# Altium PCB PCB2 - 副本.PCBDOC (part 3 of 3)
Units mil, origin at the board's own origin, x right, y up, seen from the top; angles counter-clockwise.
Board outline 6000 x 4000 mil, 2 copper layers (Top Layer, Bottom Layer); 72 components, 143 nets, 481 pads, 207 vias.
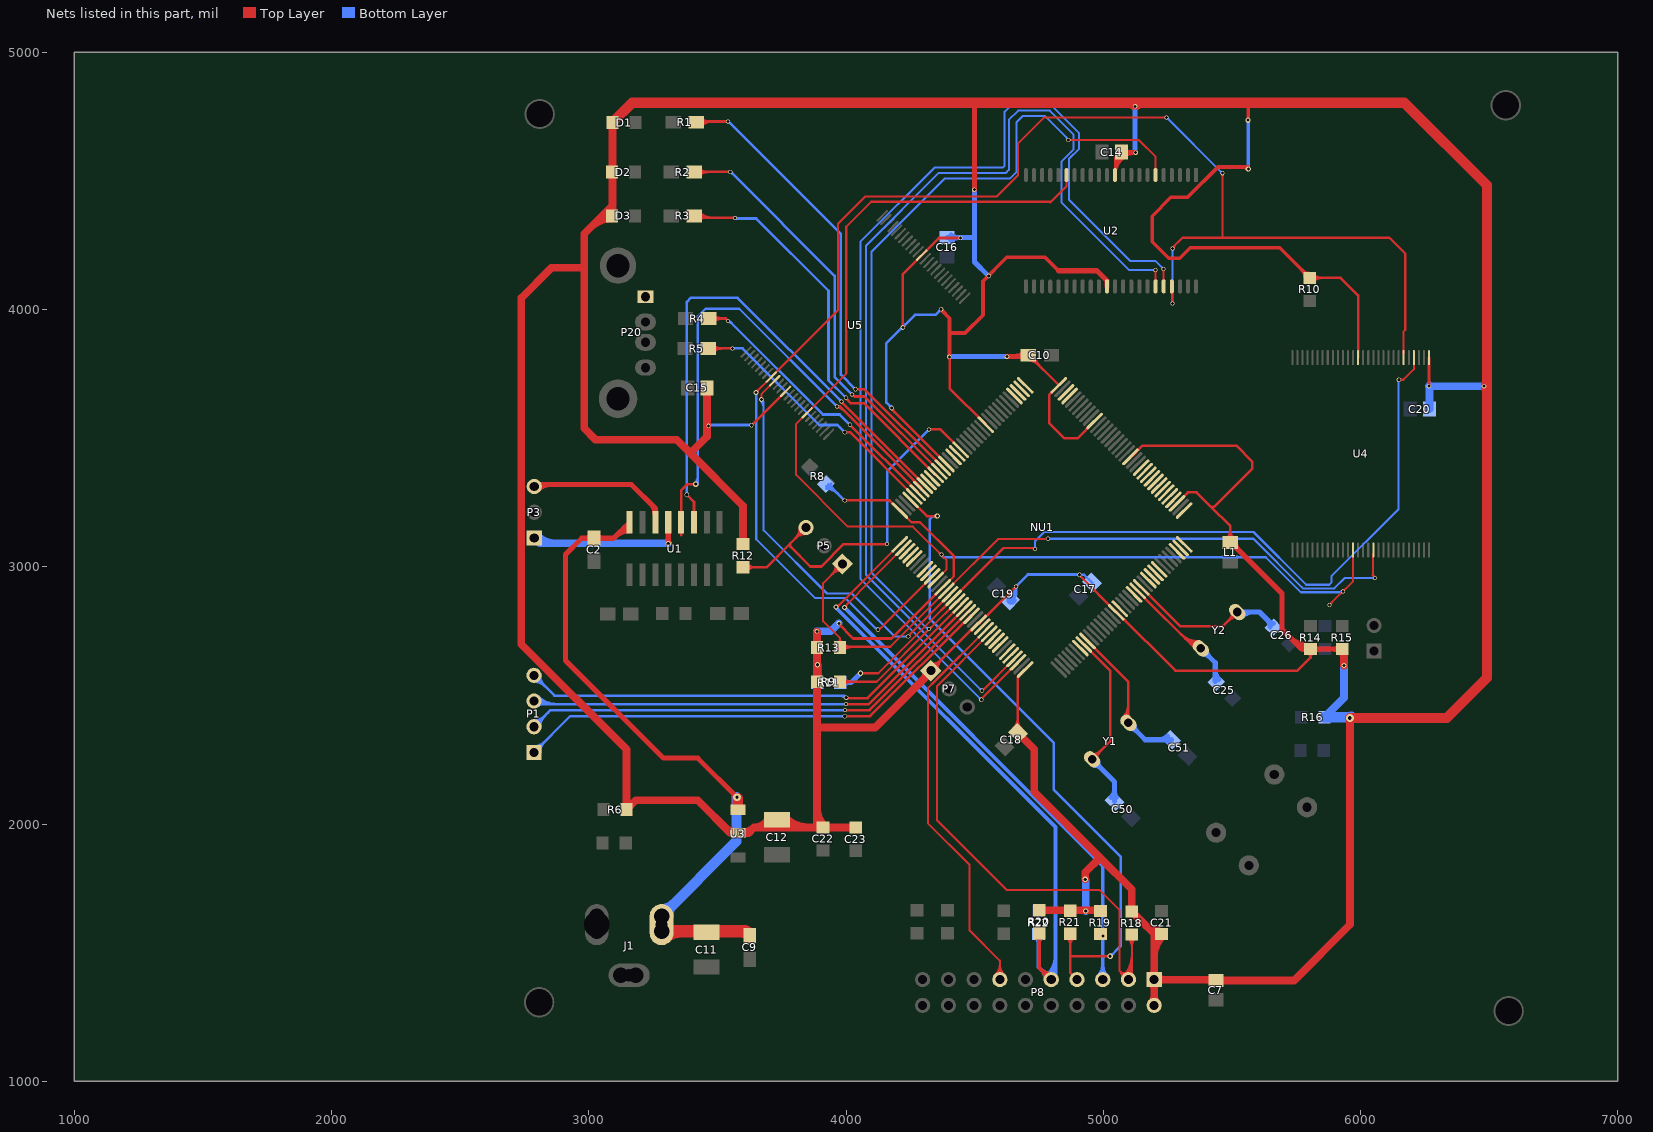
[diagram p3: the nets of this part, all layers, seen from the top]

## Via types
v1: diameter 16, hole 12, Top Layer to Bottom Layer, 141 vias
v2: diameter 18, hole 12, Top Layer to Bottom Layer, 34 vias
v3: diameter 20, hole 12, Top Layer to Bottom Layer, 29 vias
v4: diameter 30, hole 12, Top Layer to Bottom Layer, 2 vias
v5: diameter 30, hole 14, Top Layer to Bottom Layer, 1 vias

## Nets (pads, with @x,y where several pads share a name; then routed paths per layer and width w, separated by ;. In a path a pad name is that pad's centre, name@x,y a point inside that pad or via, vN(x,y) a via of type N, cw(c..) or ccw(c..) an arc to the next point about the centre after c; other vN are vias at no path point) (continued)
OSCIN: C25.2 NU1.23 Y2.2 | length 754.7
  Top Layer w10: NU1.23@5133.65,2906.63 5357.7,2682.58 Y2.2@5379.58,2682.58 ; 5302.02,2738.26 ccw(c5371.27,2807.51) Y2.2@5371.27,2709.57 ; 5319.09,2721.18 ccw(c5371.27,2773.37) Y2.2@5371.27,2699.57 ; 5336.16,2704.11 ccw(c5371.27,2739.22) Y2.2@5371.27,2689.57
  Bottom Layer w20: Y2.2@5379.58,2682.58 5435.36,2626.8 C25.2@5435.36,2554.64 ; Y2.2@5387.89,2660.59 cw(c5387.89,2627.55) 5411.25,2650.91 cw(c5434.61,2674.27) Y2.2@5401.57,2674.27 ; 5435.36,2597.51 ccw(c5485.23,2597.51) C25.2@5449.97,2562.25
OSCOUT: C26.2 NU1.24 Y2.1 | length 782.5
  Top Layer w10: NU1.24@5147.57,2920.55 5299.11,2769 5466,2769 Y2.1@5521,2824 ; Y2.1@5502.31,2824 cw(c5457.21,2824) 5489.1,2792.1 cw(c5521,2760.21) Y2.1@5521,2805.31
  Bottom Layer w20: Y2.1@5521,2824 5608,2824 C26.2@5654.36,2777.64 ; Y2.1@5538.98,2806.02 cw(c5582.4,2762.6) 5582.4,2824 ; 5636,2796 cw(c5605.57,2765.57) C26.2@5648.61,2765.57 ; 5646,2786 ccw(c5662.29,2802.3) C26.2@5662.29,2779.25
PA0: NU1.34
PA1: NU1.35
PA2: NU1.36
PA3: NU1.37
PA4: NU1.40
PA5: NU1.41
PA6: NU1.42
PA7: NU1.43
PA8: NU1.100
PA9: NU1.101 U1.11 | length 2167.6
  Top Layer w10: v2@3381,3276 cw(c3381,3266.34) 3387.83,3273.17 cw(c3394.66,3280) v2@3385,3280 ; v2(3381,3280) 3409,3252 U1.11@3409,3173.36 ; U1.11@3404.18,3209.67 ccw(c3392.56,3221.3) 3409,3221.3 ccw(c3425.44,3221.3) U1.11@3413.82,3209.67 ; v1@3984,3642 3984,3638.69 NU1.101@4306.83,3315.86 ; v1@3985,3642 ccw(c3995.4,3642) 3988.05,3634.65
  Bottom Layer w10: v2@3378.17,3282.83 ccw(c3371.34,3289.66) 3381,3289.66 ccw(c3390.66,3289.66) v2@3383.83,3282.83 ; v2@3381,3279 v2(3381,3280) 3381,4030 3396,4045 3579,4045 v1(3982,3642)
PA10: NU1.102 U1.12 | length 2244.5
  Top Layer w10: U1.12@3354.18,3137.05 cw(c3342.56,3125.42) 3359,3125.42 cw(c3375.44,3125.42) U1.12@3363.82,3137.05 ; U1.12@3354.18,3209.67 ccw(c3342.56,3221.3) 3359,3221.3 ccw(c3375.44,3221.3) U1.12@3363.82,3209.67 ; 3359,3123 U1.12@3359,3173.36 3359,3297 3383,3321 v3(3416,3321) ; v3@3412.46,3317.46 ccw(c3403.93,3308.93) 3403.93,3321 ccw(c3403.93,3333.07) v3@3412.46,3324.54 ; v1@3965,3620 cw(c3965,3586.72) 3988.53,3610.25 ; v1(3965,3623) 3975.78,3623 4292.92,3305.87 NU1.102@4292.92,3301.94 ; v1@3966.26,3620.28 cw(c3971.8,3608.23) 3981.18,3617.61 ; 4262.14,3336.64 cw(c4253.89,3328.38) NU1.102@4265.56,3328.38
  Bottom Layer w10: v3@3412.46,3324.54 ccw(c3384.62,3352.38) 3424,3352.38 ; v3@3415,3324 3424,3333 ; v3@3419.54,3317.46 ccw(c3408.76,3328.24) 3424,3328.24 ; v3@3420.87,3322.12 cw(c3432.26,3324.74) 3424,3333 ; v1(3965,3623) 3585,4003 3454,4003 3424,3973 3424,3333
PA11: NU1.103 R4.2 | length 1181.8
  Top Layer w10: R4.2@3466,3965 3532,3965 v1(3542,3955) ; R4.2@3485.14,3950.86 cw(c3519.28,3916.72) 3519.28,3965 cw(c3519.28,4013.28) R4.2@3485.14,3979.14 ; v1@4016.01,3551 NU1.103@4279,3288.02
  Bottom Layer w10: 3555.66,3946.34 ccw(c3542,3932.69) 3542,3952 3550,3952 3910,3592 3975,3592 v1(4015,3552)
PA12: NU1.104 R5.2 | length 1136.1
  Top Layer w10: R5.2@3464,3848 3465,3849 v1(3559,3849) ; R5.2@3476.07,3840.93 cw(c3495.56,3821.44) 3495.56,3849 ; R5.2@3483.14,3833.86 cw(c3519.7,3797.3) 3519.7,3849 ; R5.2@3483.14,3862.14 ccw(c3514.87,3893.87) 3514.87,3849 ; v1(3995,3523) 4016.18,3523 NU1.104@4265.08,3274.1
  Bottom Layer w10: v1@3560,3849 3598,3849 3896,3551 3967,3551 v1(3995,3523)
PA13: NU1.105 P8.7 R21.1 | length 2675.8
  Top Layer w10: NU1.105@4251.16,3260.18 4314.34,3197 v3(4355,3197) ; v3@4351.46,3193.46 ccw(c4342.93,3184.93) 4342.93,3197 ccw(c4342.93,3209.07) v3@4351.46,3200.54 ; R21.1@4858.79,1559.79 cw(c4826.89,1527.89) 4872,1527.89 cw(c4917.11,1527.89) R21.1@4885.21,1559.79 ; R21.1@4872,1573 4872,1484 ; P8.7@4898,1395 4872,1421 4872,1484 ; v3@5023.46,1482.46 ccw(c5014.93,1473.93) 5014.93,1486 ccw(c5014.93,1498.07) v3@5023.46,1489.54 ; v3(5027,1486) 4874,1486 4872,1484
  Bottom Layer w10: v3@4351.46,3193.46 ccw(c4342.93,3184.93) 4342.93,3197 ccw(c4342.93,3209.07) v3@4351.46,3200.54 ; v3(4355,3197) 4338,3197 4325,3184 4325,2798 4807,2316 4807,2134 5068,1873 5068,1525 v3@5027,1484 ; v3@5027,1491 ccw(c5027,1507.9) 5038.95,1495.95
PA14: NU1.109 P8.9 R20.1 R22.1 | length 2980
  Top Layer w8: v3@3961,2849 ccw(c3961,2872.71) 3977.76,2855.94 ; v3@3962.91,2841.09 NU1.109@4209.4,3087.58
  Top Layer w15: R20.1@4739.56,1563.56 cw(c4711.93,1535.93) 4751,1535.93 cw(c4790.07,1535.93) R20.1@4762.44,1563.56 ; R20.1@4751,1575 4751,1442 P8.9@4798,1395 ; P8.9@4775.97,1395 ccw(c4722.79,1395) 4760.4,1432.6 ccw(c4798,1470.21) P8.9@4798,1417.03
  Bottom Layer w15: v3(3961,2843) 3961,2840.77 4814,1987.77 P8.9@4814,1411 ; R22.1@4737.56,1560.56 cw(c4709.93,1532.93) 4749,1532.93 cw(c4788.07,1532.93) R22.1@4760.44,1560.56 ; R22.1@4749,1572 4749,1444 P8.9@4798,1395 ; P8.9@4775.97,1395 ccw(c4722.79,1395) 4760.4,1432.6 ccw(c4798,1470.21) P8.9@4798,1417.03 ; P8.9@4782.42,1410.58 ccw(c4706.19,1486.81) 4814,1486.81 ; P8.9@4793.03,1399.97 ccw(c4742.41,1450.59) 4814,1450.59
PA15: NU1.110 P8.5 R19.1 | length 2295.4
  Top Layer w8: v3@3991,2841.34 4108.33,2958.67 ; v3@4000,2841 cw(c4022.55,2841) 4006.61,2856.95 ; 4105.66,2956 4108.33,2958.67 ; NU1.110@4223.32,3073.66 4108.33,2958.67
  Bottom Layer w15: v3(3994,2841) 4998,1837 P8.5@4998,1395 ; P8.5@4982.42,1410.58 ccw(c4944.82,1448.18) 4998,1448.18 ccw(c5051.18,1448.18) P8.5@5013.58,1410.58
  other v3: 4999,1564
PB0: NU1.46
PB1: NU1.47
PB2: NU1.48
PB3: NU1.133 P8.13 | length 1731.2
  Top Layer w8: 4346,2556 4318,2528 4318,2003 4480,1841 4480,1587 4598,1469 P8.13@4598,1395 ; 4346,2556.05 NU1.133@4543.47,2753.51 ; P8.13@4579.95,1413.05 ccw(c4536.37,1456.63) 4598,1456.63 ccw(c4659.63,1456.63) P8.13@4616.05,1413.05 ; P8.13@4585.61,1407.39 ccw(c4555.68,1437.32) 4598,1437.32 ccw(c4640.32,1437.32) P8.13@4610.39,1407.39
PB4: NU1.134 P8.3 R18.1 | length 2616.2
  Top Layer w8: NU1.134@4557.38,2739.59 4354.4,2536.6 4354.4,2013.6 4624,1744 4985,1744 5063,1666 5063,1430 ; P8.3@5072.83,1399.24 ccw(c5038.1,1405.09) 5063,1430 ; P8.3@5079.95,1413.05 ccw(c5004.99,1488.01) 5111,1488.01 ; P8.3@5080.72,1397.91 ccw(c5056.87,1401.93) 5073.97,1419.03 ccw(c5091.07,1436.13) P8.3@5095.09,1412.28 ; P8.3@5085.61,1407.39 ccw(c5024.3,1468.7) 5111,1468.7 ; P8.3@5091.26,1401.74 ccw(c5043.61,1449.39) 5111,1449.39 ; P8.3@5093.76,1420.17 cw(c5087.91,1454.9) 5063,1430 ; P8.3@5096.92,1396.08 ccw(c5062.93,1430.07) 5111,1430.07 ; R18.1@5097.08,1556.08 cw(c5063.48,1522.48) 5111,1522.48 cw(c5158.52,1522.48) R18.1@5124.92,1556.08 ; R18.1@5102.74,1561.74 cw(c5082.79,1541.79) 5111,1541.79 cw(c5139.21,1541.79) R18.1@5119.26,1561.74 ; 5111,1425.24 ccw(c5128.24,1425.24) P8.3@5116.05,1413.05 ; R18.1@5111,1570 5111,1408 P8.3@5098,1395 5063,1430
PB5: NU1.135
PB6: NU1.136
PB7: NU1.137
PB8: NU1.139
PB9: NU1.140
PB10: NU1.69
PB11: NU1.70
PB12: NU1.73
PB13: NU1.74
PB14: NU1.75
PB15: NU1.76
PC0: NU1.26
PC1: NU1.27
PC2: NU1.28
PC3: NU1.29
PC4: NU1.44
PC5: NU1.45
PC6: NU1.96 R1.1 | length 1943.5
  Top Layer w10: R1.1@3421,4731 v1(3541,4731) ; R1.1@3430.07,4720.93 cw(c3454.38,4696.62) 3454.38,4731 ; R1.1@3437.14,4713.86 cw(c3478.53,4672.47) 3478.53,4731 ; R1.1@3437.14,4742.14 ccw(c3464.04,4769.04) 3464.04,4731 ; v1(4037,3690) 4071.89,3690 NU1.96@4376.43,3385.45
  Bottom Layer w10: v1@3541,4728 cw(c3541,4715.93) 3549.54,4724.46 ; v1@3543,4731 3980,4294 3980,3747 v1(4037,3690)
PC7: NU1.97 R2.1 | length 1782
  Top Layer w10: R2.1@3411,4535 v1(3550,4535) ; R2.1@3422.07,4526.93 cw(c3441.56,4507.44) 3441.56,4535 ; R2.1@3429.14,4519.86 cw(c3465.7,4483.3) 3465.7,4535 ; R2.1@3429.14,4548.14 ccw(c3460.87,4579.87) 3460.87,4535 ; v1@4023,3667 cw(c4023,3652.51) 4033.24,3662.76 ; v1(4023,3670) 4026,3670 4034,3662 4072.05,3662 NU1.97@4362.51,3371.53
  Bottom Layer w10: v1@3550,4532 cw(c3550,4519.93) 3558.54,4528.46 ; v1@3551,4536 3956,4131 3956,3737 v1(4023,3670)
PC8: NU1.98 R3.1 | length 1687.1
  Top Layer w10: R3.1@3418,4356 v1(3569,4356) ; R3.1@3422.07,4371.07 ccw(c3458.46,4407.46) 3458.46,4356 ; R3.1@3429.14,4349.86 cw(c3443.97,4335.03) 3443.97,4356 ; R3.1@3429.14,4378.14 ccw(c3482.6,4431.6) 3482.6,4356 ; v1(4000,3657) 4000,3655 4020,3635 4071.21,3635 NU1.98@4348.59,3357.62 ; v1@4003,3657 ccw(c4015.07,3657) 4006.54,3648.46
  Bottom Layer w10: v1@3567,4354 3651,4354 3932,4073 3932,3725 v1(4000,3657) ; v1@3571.12,4358.12 ccw(c3581.07,4368.07) 3581.07,4354
PC9: NU1.99
PC10: NU1.111
PC11: NU1.112
PC12: NU1.113
PC13: NU1.7
PC14: C50.2 NU1.8 Y1.2 | length 897.5
  Top Layer w10: NU1.8@4924.86,2697.83 5028,2594.69 5028,2323 Y1.2@4956.58,2251.58 ; Y1.2@4956.58,2270.26 ccw(c4956.58,2315.37) 4988.48,2283.48 ccw(c5020.37,2251.58) Y1.2@4975.26,2251.58
  Bottom Layer w20: Y1.2@4956.58,2251.58 5044.36,2163.8 C50.2@5044.36,2088.64 ; Y1.2@4964.89,2229.59 cw(c4964.89,2196.55) 4988.25,2219.91 cw(c5011.61,2243.27) Y1.2@4978.57,2243.27 ; C50.2@5030.22,2102.78 ccw(c4996.08,2136.92) 5044.36,2136.92 ; C50.2@5044.36,2119.85 ccw(c5068.5,2119.85) C50.2@5051.43,2102.78
PC15: C51.2 NU1.9 Y1.1 | length 796.5
  Top Layer w10: NU1.9@4938.78,2711.75 5098,2552.53 Y1.1@5098,2393 ; Y1.1@5076.48,2414.52 ccw(c5024.53,2466.47) 5098,2466.47 ; Y1.1@5083.55,2407.45 ccw(c5048.67,2442.33) 5098,2442.33 ; 5098,2426.36 ccw(c5114.75,2426.36) Y1.1@5102.9,2414.52
  Bottom Layer w20: Y1.1@5098,2393 5163.36,2327.64 C51.2@5264.36,2327.64 ; Y1.1@5106.31,2371.01 cw(c5106.31,2337.97) 5129.67,2361.33 cw(c5153.03,2384.69) Y1.1@5119.99,2384.69 ; 5216.08,2327.64 ccw(c5216.08,2375.92) C51.2@5250.22,2341.78 ; C51.2@5233.15,2327.64 cw(c5233.15,2303.5) C51.2@5250.22,2320.57
PD2: NU1.116
PD3: NU1.117
PD4: NU1.118 U2.41 U4.34 U5.8 | length 6187
  Top Layer w8: v3(3650,3678) 3709.44,3737.44 U5.8@3709.44,3737.56 3969,3997.13 3969,4333 4076,4440 4587,4440 4668,4521 4668,4644 4771,4747 v1@5244,4747 ; v3@3650,3684 ccw(c3650,3698.49) 3660.24,3688.24 ccw(c3670.49,3678) v3@3656,3678 ; v1@4125,2756 4129,2756 4150,2777 4150,2777.63 NU1.118@4334.67,2962.3 ; v1@4125,2759 ccw(c4125,2775.9) 4136.95,2763.95 ; v1@5243.17,4744.17 ccw(c5236.34,4737.34) 5236.34,4747 ccw(c5236.34,4756.66) v1@5243.17,4749.83 ; U2.41@5263.77,4067.5 cw(c5257.16,4060.89) 5266.51,4060.89 cw(c5275.86,4060.89) U2.41@5269.25,4067.5 ; 5266.51,4039.66 ccw(c5284.66,4039.66) v1@5271.83,4026.83 ; U2.41@5266.51,4089.93 5266.51,4030.49 v1@5274,4023 ; v1@5266.51,4237.51 5308,4279 6113,4279 6173,4219 ; v1@5274,4237 cw(c5293.31,4237) 5279.66,4250.66 ; v1@5460.17,4527.17 cw(c5453.34,4520.34) 5463,4520.34 cw(c5472.66,4520.34) v1@5465.83,4527.17 ; 5463,4283 v1(5463,4530) ; U4.34@6167,3828 6167,3914 6174,3921 6174,4216 6173,4217
  Bottom Layer w8: v3@3645.76,3673.76 cw(c3633.1,3661.1) 3651,3661.1 ; 3651,3665.93 cw(c3662.07,3665.93) v3@3654.24,3673.76 ; v3@3651,3683 3651,3107 3879,2879 3996,2879 4121,2754 v1@4125,2754 ; 4109.64,2765.36 ccw(c4125,2780.73) v1@4125,2759 ; v1@5246,4743 cw(c5246,4733.34) 5252.83,4740.17 cw(c5259.66,4747) v1@5250,4747 ; v1(5246,4747) v1(5463,4530) v1@5465,4528 ; v1@5266.17,4026.83 ccw(c5256.93,4036.07) 5270,4036.07 ; v1@5267.17,4234.17 cw(c5260.34,4227.34) 5270,4227.34 cw(c5279.66,4227.34) v1@5272.83,4234.17 ; v1@5270,4021 v1(5270,4237) ; v1@5459,4530 ccw(c5449.34,4530) 5456.17,4536.83 ccw(c5463,4543.66) v1@5463,4534
  other v1: 4125,2755 5269,4024
PD5: NU1.119 U2.17 U4.13 U5.18 | length 4798.4
  Top Layer w8: NU1.119@4348.59,2948.38 4391,2990.79 4391,3025 4260,3156 4007,3156 3806,3357 3806,3555.74 4001,3750.74 4001,4322 4098,4419 4797,4419 ; 4360.76,3055.24 ccw(c4371,3065.49) v1@4371,3051 ; v1@4375,3047 ccw(c4389.49,3047) 4379.24,3036.76 ; 4794,4416 4857.06,4479.06 U2.17@4857.06,4523 ; U2.17@4854.32,4500.58 cw(c4847.71,4493.96) 4857.06,4493.96 cw(c4866.42,4493.96) U2.17@4859.8,4500.58 ; v1@5879,2855 ccw(c5879,2864.17) 5885.49,2857.69 ; v1@5880,2852.2 5891,2863.2 5891,2864 5971.22,2944.22 U4.13@5971.22,3065 ; v1@5883,2851 cw(c5893.14,2851) 5885.97,2858.17 ; 5923.46,2896.46 cw(c5932,2887.93) v1@5932,2900 ; v1@5936,2904 cw(c5948.07,2904) 5939.54,2912.54
  Bottom Layer w8: v1@4371,3044 4378,3037 5632,3037 5768,2901 5930,2901 v1@5932,2903 ; v1@4374.79,3045.73 ccw(c4381.5,3043.5) 4376.5,3038.5 ; 5915.1,2901 ccw(c5915.1,2920.9) v1@5929.17,2906.83
  other v1: 5879,2851 5932,2904 4371,3047
PD6: NU1.122 P5.1 R13.2 U4.17 | length 3209.1
  Top Layer w8: P5.1@3960.47,3011 cw(c3898.84,3011) 3942.42,2967.42 cw(c3986,2923.84) P5.1@3986,2985.47 ; R13.2@3966.91,2704.22 ccw(c3956.29,2722) 3977,2722 ; P5.1@3968.47,3011 cw(c3926.16,3011) 3956.08,2981.08 cw(c3986,2951.16) P5.1@3986,2993.47 ; R13.2@3977,2686 3977,2722 ; R13.2@3980,2689 4153,2689 ; R13.2@3985.26,2679.05 cw(c4009.28,2655.04) 4009.28,2689 ; R13.2@3985.26,2695.58 ccw(c4001.14,2711.46) 4001.14,2689 ; P5.1@3986,3011 3911,2936 3911,2788 3977,2722 ; R13.2@3987.09,2704.22 cw(c3997.71,2722) 3977,2722 ; R13.2@3990.92,2673.4 cw(c4028.59,2635.72) 4028.59,2689 ; R13.2@3990.92,2701.23 ccw(c4020.46,2730.77) 4020.46,2689 ; 4149,2689 4153,2689 ; 4772.93,3108 ccw(c4772.93,3121.07) v1@4782.17,3111.83 ; v1@4787,3112 4783,3108 4591.73,3108 NU1.122@4390.35,2906.63 4172.73,2689 4153,2689 ; 6047,2969 cw(c6034.89,2956.88) v1@6052,2956.17 ; U4.17@6049,3050 6049,2967 v1@6059,2957
  Bottom Layer w8: v1(4785,3109) 5584,3109 5772,2921 ; v1@4787.83,3106.17 cw(c4794.66,3099.34) 4794.66,3109 cw(c4794.66,3118.66) v1@4787.83,3111.83 ; 5772,2920 5777,2915 5889,2915 ; 5890,2916 5898,2916 5938,2956 v1@6052,2956 ; v1@6053.17,2953.17 ccw(c6046.34,2946.34) 6046.34,2956 ccw(c6046.34,2965.66) v1@6053.17,2958.83
  other v1: 6056,2956
PD7: NU1.123 U5.9 | length 1664.7
  Top Layer w8: v2@3667.46,3653.54 ccw(c3658.93,3662.07) 3671,3662.07 ccw(c3683.07,3662.07) v2@3674.54,3653.54 ; v2(3671,3650) 3671,3671.29 U5.9@3723.36,3723.64 ; v1@4243,2729 4243,2731.44 NU1.123@4404.27,2892.71 NU1.123@4404.71,2892.71 ; v1@4246,2729 cw(c4259.12,2729) 4249.84,2738.28
  Bottom Layer w8: v2@3667.46,3646.46 cw(c3637.2,3616.2) 3680,3616.2 ; v2@3673,3648 3680,3641 3680,3142 3926,2896 4023,2896 4190,2729 v1(4242,2729) ; v2@3673.12,3652.12 cw(c3656.51,3635.51) 3680,3635.51 ; v1@4239.17,2726.17 ccw(c4232.34,2719.34) 4232.34,2729 ccw(c4232.34,2738.66) v1@4239.17,2731.83
PE0: NU1.141 U2.39 | length 4161.8
  Top Layer w8: v1@4528,2522 ccw(c4528,2538.09) 4539.37,2526.71 ; v1@4530.66,2518 NU1.141@4654.82,2642.16 ; v1@5200.17,4150.17 cw(c5192.09,4142.09) 5203.52,4142.09 ; U2.39@5200.78,4112.35 ccw(c5194.17,4118.97) 5203.52,4118.97 ccw(c5212.87,4118.97) U2.39@5206.26,4112.35 ; U2.39@5203.52,4089.93 v1@5203.52,4151.48 ; 5203.52,4144.6 cw(c5211.4,4144.6) v1@5205.83,4150.17
  Bottom Layer w8: v1@4524,2518 ccw(c4514.34,2518) 4521.17,2524.83 ccw(c4528,2531.66) v1@4528,2522 ; v1(4528,2518) 4078,2968 4078,4249 4359,4530 4620,4530 4633,4543 4633,4737 4669,4773 4792,4773 4885,4680 4885,4623.2 4837,4575.2 4837,4417 5101,4153 v1(5203,4153) ; v1@5200.17,4150.17 ccw(c5193.34,4143.34) 5193.34,4153 ccw(c5193.34,4162.66) v1@5200.17,4155.83
PE1: NU1.142 U2.40 | length 4306.6
  Top Layer w8: v1@4523,2482.5 NU1.142@4668.74,2628.24 ; v1@4530,2483 cw(c4545.69,2483) 4534.59,2494.09 ; v1@5231.17,4155.17 cw(c5221.89,4145.89) 5235.02,4145.89 ; U2.40@5232.28,4112.35 ccw(c5225.66,4118.97) 5235.02,4118.97 ccw(c5244.37,4118.97) U2.40@5237.75,4112.35 ; U2.40@5235.02,4089.93 v1@5235.02,4155.98
  Bottom Layer w8: v1@4522,2483 ccw(c4512.34,2483) 4519.17,2489.83 ccw(c4526,2496.66) v1@4526,2487 ; v1(4526,2483) 4056,2953 4056,4263 4346,4553 4611,4553 4617,4559 4617,4769 4644,4796 4796,4796 4905,4687 4905,4623.4 4867,4585.4 4867,4427 5106,4188 5204,4188 v1(5234,4158) ; v1@5230,4158 ccw(c5220.34,4158) 5227.17,4164.83 ccw(c5234,4171.66) v1@5234,4162
PF6: NU1.18
PF10: NU1.22
PF11: NU1.49
PG6: NU1.91 P5.3 R12.1 | length 1675.6
  Top Layer w10: R12.1@3600,2998 3690.16,2998 3783.58,3091.42 ; R12.1@3614.53,2984.79 cw(c3646.42,2952.89) 3646.42,2998 cw(c3646.42,3043.11) R12.1@3614.53,3011.21 ; P5.3@3820.05,3152.42 cw(c3760.84,3152.42) 3802.71,3110.55 cw(c3844.58,3068.68) P5.3@3844.58,3127.89 ; P5.3@3830.05,3152.42 cw(c3794.98,3152.42) 3819.78,3127.62 cw(c3844.58,3102.82) P5.3@3844.58,3137.89 ; P5.3@3844.58,3152.42 3783.58,3091.42 ; v1(4159,3088) 3991,3088 3904,3001 3861,3001 3783.58,3078.42 3783.58,3091.42 ; v1@4323,3534 4367.08,3534 NU1.91@4446.03,3455.05 ; v1@4324.12,3530.88 cw(c4331.66,3523.34) 4331.66,3534
  Bottom Layer w10: v1@4156.88,3090.12 ccw(c4149.34,3097.66) 4160,3097.66 ; v1@4160,3087 4160,3200 ; 4160,3194 4160,3200 ; v1(4322,3533) 4160,3371 4160,3200
PG7: NU1.92
PG8: NU1.93
PG9: NU1.124 R11.1 U4.32 | length 3410.9
  Top Layer w8: v3@4057,2586 4125.4,2586 4612.4,3073 4731,3073 v1(4735,3069) ; v3@4060.24,2581.76 cw(c4070.49,2571.51) 4070.49,2586 cw(c4070.49,2600.49) v3@4060.24,2590.24 ; 4715.69,3073 cw(c4715.69,3049.69) v1@4732.17,3066.17 ; v1(6149,3727) 6167,3727 6207.44,3767.44 U4.32@6207.44,3813.03 ; v1@6151.83,3724.17 cw(c6158.66,3717.34) 6158.66,3727 cw(c6158.66,3736.66) v1@6151.83,3729.83
  Bottom Layer w8: v1@4732.17,3071.83 ccw(c4725.34,3078.66) 4735,3078.66 ccw(c4744.66,3078.66) v1@4737.83,3071.83 ; v1(4735,3069) 4735,3100 4770,3135 5584,3135 5789,2930 5879,2930 5887,2938 ; 5887,2939 5887,2963 6148,3224 6148,3726 v1(6149,3727) ; 6148,3714.93 cw(c6161.07,3714.93) v1@6151.83,3724.17
  Bottom Layer w20: R11.1@3978,2550 4020,2550 v3(4056,2586) ; R11.1@3987.68,2540.32 cw(c4011.04,2516.96) 4011.04,2550 cw(c4011.04,2583.04) R11.1@3987.68,2559.68
PG10: NU1.125 R9.1 U2.6 | length 3960
  Top Layer w8: R9.1@3977,2553 4119,2553 4332,2766 4332,2764.76 ; R9.1@3985.26,2544.74 cw(c4005.21,2524.79) 4005.21,2553 cw(c4005.21,2581.21) R9.1@3985.26,2561.26 ; R9.1@3990.92,2539.08 cw(c4024.52,2505.48) 4024.52,2553 cw(c4024.52,2600.52) R9.1@3990.92,2566.92 ; 4315.46,2749.46 ccw(c4306.93,2758) v1@4319,2758 ; 4330.24,2763 4332,2764.76 ; 4331.54,2765.54 cw(c4323,2774.07) 4323,2762 ccw(c4323,2777.07) 4333.66,2766.41 ; NU1.125@4437.45,2864.87 NU1.125@4432.11,2864.87 4332,2764.76 ; v1(4864,4659) 5138,4659 5203.52,4593.48 U2.6@5203.52,4523 ; v1@4866.83,4656.17 cw(c4873.66,4649.34) 4873.66,4659 cw(c4873.66,4668.66) v1@4866.83,4661.83 ; U2.6@5200.78,4545.42 ccw(c5194.17,4552.04) 5203.52,4552.04 ccw(c5212.87,4552.04) U2.6@5206.26,4545.42 ; 4332,2764.76 cw(c4324.99,2771.76) 4323.57,2761.96 ccw(c4324.99,2771.76) 4332,2764.76
  Bottom Layer w8: 4305.93,2769.07 ccw(c4323,2786.14) v1@4323,2762 ; v1@4325,2759 4316,2759 4099,2976 4099,4224 4385,4510 4638,4510 4662,4534 4662,4727 4688,4753 4773,4753 v1@4864,4662 ; 4855.05,4670.95 cw(c4843.1,4659) v1@4860,4659
  other v1: 4323,2758
PG11: NU1.126 P1.4 | length 2029.3
  Top Layer w10: v1@4003,2489 4084.08,2489 NU1.126@4446.03,2850.95 ; v1@4003.12,2493.12 ccw(c4013.07,2503.07) 4013.07,2489
  Bottom Layer w10: P1.4@2787,2553.47 cw(c2787,2494.26) 2828.87,2536.13 cw(c2870.74,2578) P1.4@2811.53,2578 ; P1.4@2787,2563.47 cw(c2787,2528.4) 2811.8,2553.2 cw(c2836.6,2578) P1.4@2801.53,2578 ; P1.4@2787,2578 2866,2499 3993,2499 v1(4001,2491) ; 3974.44,2499 cw(c3974.44,2464.44) v1@3998.88,2488.88
PG12: NU1.127 P1.3 | length 2034.9
  Top Layer w10: v1@3999,2465 4087.92,2465 NU1.127@4459.95,2837.03 ; v1@4002.12,2468.12 ccw(c4009.66,2475.66) 4009.66,2465
  Bottom Layer w10: P1.3@2787,2478 2799,2466 v1(4000,2466) ; P1.3@2790.2,2481.2 ccw(c2826.9,2517.9) 2826.9,2466 ; P1.3@2797.27,2488.27 ccw(c2851.04,2542.04) 2851.04,2466 ; P1.3@2804.34,2460.66 cw(c2817.24,2447.76) 2817.24,2466 ; P1.3@2804.34,2495.34 ccw(c2875.19,2566.19) 2875.19,2466
PG13: NU1.128 P1.2 | length 2037.3
  Top Layer w10: v1@3995,2443 v1(3996,2443) 4092,2443 4472.11,2823.11 NU1.128@4473.87,2823.11
  Bottom Layer w10: P1.2@2787,2378 2830,2421 ; P1.2@2787,2392.53 ccw(c2787,2427.6) 2811.8,2402.8 ccw(c2836.6,2378) P1.2@2801.53,2378 ; P1.2@2787,2402.53 ccw(c2787,2461.74) 2828.87,2419.87 ccw(c2870.74,2378) P1.2@2811.53,2378 ; 2842,2433 2830,2421 ; v1(3996,2443) 2852,2443 2830,2421
PG14: NU1.129 P1.1 | length 2080.1
  Top Layer w10: v1@3993,2419 v1(3995,2419) 4093.67,2419 4483.86,2809.19 NU1.129@4487.79,2809.19 ; 4453.08,2778.42 cw(c4461.34,2770.16) NU1.129@4461.34,2781.84
  Bottom Layer w10: P1.1@2787,2278 2928,2419 v1(3995,2419) ; P1.1@2787,2292.53 ccw(c2787,2327.6) 2811.8,2302.8 ccw(c2836.6,2278) P1.1@2801.53,2278 ; P1.1@2787,2302.53 ccw(c2787,2361.74) 2828.87,2319.87 ccw(c2870.74,2278) P1.1@2811.53,2278
PG15: NU1.132
R1IN: P3.1 U1.13 | length 665.2
  Top Layer w20: v3@3309,3092 U1.13@3309,3173.36
  Bottom Layer w30: P3.1@2798.27,3122.27 ccw(c2873.77,3197.77) 2873.77,3091 ; P3.1@2809,3091 v3(3309,3091)
T1OUT: P3.3 U1.14 | length 681.6
  Top Layer w20: P3.3@2771,3320 3165,3320 3259,3226 U1.14@3259,3173.36 ; P3.3@2801.81,3298.19 cw(c2854.46,3245.54) 2854.46,3320 ; 3240.96,3244.04 cw(c3201.78,3204.86) U1.14@3257.19,3204.86
"USB 5V": P20.1
VDD5: C2.1 C9.1 C11.1 J1.1 U1.16 U3.3 | length 2953.8
  Top Layer w20: C2.1@3010.39,3100.39 ccw(c2984.79,3074.79) 2984.79,3111 ccw(c2984.79,3147.21) C2.1@3010.39,3121.61 ; C2.1@3031.61,3100.39 cw(c3057.21,3074.79) 3057.21,3111 cw(c3057.21,3147.21) C2.1@3031.61,3121.61 ; 3102.14,3116.5 cw(c3159,3059.64) U1.16@3159,3140.05 ; 3136.28,3150.65 cw(c3159,3127.93) U1.16@3159,3160.05 ; U1.16@3159,3173.36 3096.64,3111 C2.1@3021,3111 2973,3111 2910,3048 2910,2636 3290,2256 3424,2256 v4(3576,2104) v4@3579.68,2100.32
  Top Layer w40: U3.3@3579.68,2055.44 v4@3579.68,2100.32
  Top Layer w50: J1.1@3283,1583 C9.1@3608,1583 ; J1.1@3297.85,1560.15 cw(c3353.01,1504.99) 3353.01,1583 ; 3594.62,1583 cw(c3594.62,1538.62) C9.1@3626,1570
  Bottom Layer w40: J1.1@3283,1642 3574,1933 v4@3574,2104 ; J1.1@3283,1669 ccw(c3283,1734.18) 3329.09,1688.09 ; J1.1@3309,1643 cw(c3369.36,1643) 3326.68,1685.68
VDD33: C7.2 C10.1 C12.1 C14.2 C15.2 C16.2 C17.2 C18.2 C19.2 C20.2 C21.1 C22.1 C23.1 D1.1 D2.1 D3.1 L1.2 NU1.17 NU1.39 NU1.52 NU1.62 NU1.72 NU1.84 NU1.95 NU1.108 NU1.121 NU1.131 NU1.144 P7.1 P8.1 P8.2 R6.2 R8.1 R9.2 R10.2 R11.2 R12.2 R13.1 R14.1 R15.1 R16.2 R18.2 R19.2 R20.2 R21.2 U2.11 U2.33 U3.2 U4.29 U4.43 U5.12 U5.37 | length 33091.8
  Top Layer w10: v1@3635.23,3552 U5.12@3765.11,3681.89 ; v2@3970,2779 4028,2721 4176.89,2721 NU1.121@4376.43,2920.55 4419,2963.11 4419,3041 4287,3173 4254.82,3173 NU1.108@4209.4,3218.42 4169.82,3258 v1@3991,3258 ; v2@3976,2780 ccw(c3992.9,2780) 3980.95,2768.05 ; v1@3997.12,3254.88 cw(c4004.66,3247.34) 4004.66,3258 ; v2@4176,3613.73 NU1.95@4390.35,3399.37 ; v2@4182,3617 ccw(c4204.39,3617) 4188.56,3601.17 ; v2@4218.17,3932.83 ccw(c4211.34,3939.66) 4221,3939.66 ccw(c4230.66,3939.66) v2@4223.83,3932.83 ; v2(4221,3930) 4221,4137.77 U5.37@4294.05,4210.82 4349,4265.77 4349,4266 4361,4278 v1(4445,4278) ; P7.1@4330,2599 4512.35,2781.35 NU1.131@4515.63,2781.35 4519.56,2781.35 4663.21,2925 v1@4665,2925 ; P7.1@4330,2610.53 ccw(c4330,2638.36) 4349.68,2618.68 ; P7.1@4330,2620.53 ccw(c4330,2672.5) 4366.75,2635.75 ; P7.1@4344.53,2596 cw(c4386.84,2596) 4356.92,2625.92 ; P7.1@4354.53,2596 cw(c4420.98,2596) 4373.99,2642.99 ; v2@4369,4000 v2@4373,3996 ; v2@4399.17,3813.17 cw(c4389.93,3803.93) 4403,3803.93 ; v2@4403,3816 4403,3692.95 NU1.84@4543.47,3552.49 ; 4482.04,2751.04 cw(c4489.18,2743.91) NU1.131@4489.18,2754 ; NU1.131@4542.07,2808.7 ccw(c4542.07,2820.38) 4550.33,2812.12 ; C18.2@4651.1,2371.79 ccw(c4609.23,2413.66) 4668.45,2413.66 ; 4655.03,2916.82 ccw(c4647.85,2924) v1@4658,2924 ; C18.2@4658.17,2364.72 ccw(c4633.37,2389.52) C18.2@4668.45,2389.52 ; C18.2@4668.45,2354.45 4668.45,2572.27 NU1.144@4696.58,2600.4 ; 4668.45,2400.22 ccw(c4708.65,2400.22) C18.2@4680.22,2371.79 ; 4668.45,2567.7 cw(c4676.39,2567.7) NU1.144@4670.77,2573.31 ; C10.1@4709,3822 4711.02,3822 NU1.72@4827.42,3705.6 4790,3668.18 4790,3559 4850,3499 4899.21,3499 NU1.62@4966.62,3566.41 ; C10.1@4714,3802 cw(c4714,3760.9) 4743.06,3789.96 ; C10.1@4724,3822 ccw(c4755.33,3822) C10.1@4733.18,3799.85 ; C10.1@4734,3822 ccw(c4789.47,3822) 4750.25,3782.77 ; v1@4908,2967 5050.13,2824.87 NU1.17@5050.13,2823.11 5053.89,2823.11 5281,2596 5755,2596 5806,2647 ; v1@4910,2969 ccw(c4919.66,2969) 4912.83,2962.17 ; U2.11@5046.04,4519.58 cw(c5135,4519.58) C14.2@5082.54,4591.43 ; U2.11@5046.04,4523 C14.2@5046.04,4587.64 ; U2.11@5046.04,4539.27 cw(c5120.63,4539.27) C14.2@5076.65,4599.51 ; 5046.04,4558.95 cw(c5106.26,4558.95) C14.2@5070.75,4607.59 ; 5046.04,4578.63 cw(c5091.89,4578.63) C14.2@5064.85,4615.66 ; NU1.17@5076.58,2795.76 cw(c5076.58,2784.5) 5084.54,2792.46 ; NU1.52@5105.81,3427.21 5109.74,3427.21 5153.53,3471 5517.21,3471 5579.21,3409 5579.21,3380.21 5431.5,3232.5 5419.5,3232.5 ; NU1.52@5132.26,3454.57 ccw(c5132.26,3466.24) 5140.51,3457.98 ; NU1.39@5286.76,3246.26 5329.5,3289 5363,3289 5419.5,3232.5 ; L1.2@5479.44,3108.96 ccw(c5444.29,3144.11) 5494,3144.11 ccw(c5543.71,3144.11) L1.2@5508.56,3108.96 ; L1.2@5494,3094.4 5494,3158 5419.5,3232.5 ; R14.1@5796.39,2663.98 cw(c5786.2,2647) 5806,2647 ; R10.2@5803,4123 5923,4123 5990.9,4055.09 U4.43@5990.9,3813.03 ; R14.1@5806,2680 5806,2647 ; R14.1@5815.61,2663.98 ccw(c5825.8,2647) 5806,2647 ; R10.2@5817.53,4109.79 cw(c5849.42,4077.89) 5849.42,4123 cw(c5849.42,4168.11) R10.2@5817.53,4136.21 ; v2@6263.17,3704.83 ccw(c6255.15,3712.85) 6266.49,3712.85 ; v2@6266.49,3702.49 U4.29@6266.49,3813.03
  Top Layer w14: 5539.86,4554 cw(c5539.86,4522.86) v3@5561.88,4544.88 ; v3@5563,4554 5445.82,4554 5327.82,4436 5263,4436 5190,4363 5190,4264 5255,4199 5297,4199 5338,4240 5686,4240 R10.2@5803,4123 ; v3(5563,4736) 5563,4799 ; 5772.27,4153.73 cw(c5741.54,4123) R10.2@5785,4123 ; 5775.45,4150.55 ccw(c5801.69,4176.79) R10.2@5801.69,4139.69
  Top Layer w15: v2@4373,3996 4403,3966 4403,3858 v2@4403,3816 ; 4413,3909 4463,3909 4532,3978 4532,3996 ; 4532,3987 4532,3996 ; 4826,4151 4774,4203 4625,4203 4532,4110 4532,3996
  Top Layer w20: v2@4499,4465 v2(4499,4466) 4499,4804 ; v2@4626,3818 4705,3818 C10.1@4709,3822 ; 4658.13,3818 ccw(c4658.13,3867.87) C10.1@4693.39,3832.61 ; 4677.44,3818 cw(c4677.44,3795.44) C10.1@4693.39,3811.39 ; 4826,4151 4975.42,4151 5014.54,4111.88 U2.33@5014.54,4089.93 ; C14.2@5070.4,4612 5072.4,4610 v2(5126,4610) ; C14.2@5081.43,4597.04 cw(c5112.72,4565.75) 5112.72,4610 ; C14.2@5081.43,4619.09 ccw(c5103.36,4641.03) 5103.36,4610 ; L1.2@5494,3094.4 5496.94,3094.4 5695,2896.34 5695,2756 5771,2680 R14.1@5806,2680 R15.1@5929,2680 ; L1.2@5497.94,3078.81 cw(c5497.94,3043.57) 5522.85,3068.49 ; L1.2@5513.53,3094.4 ccw(c5553.57,3094.4) 5525.25,3066.09 ; 5723.82,2727.18 ccw(c5804.69,2808.05) R14.1@5804.69,2693.68 ; 5757.96,2693.04 ccw(c5804.69,2739.76) R14.1@5804.69,2673.69 ; R14.1@5795.01,2670.32 ccw(c5771.65,2646.96) 5771.65,2680 ccw(c5771.65,2713.04) R14.1@5795.01,2689.68 ; R14.1@5816.99,2670.32 cw(c5840.35,2646.96) 5840.35,2680 cw(c5840.35,2713.04) R14.1@5816.99,2689.68 ; R15.1@5918.01,2670.32 ccw(c5894.65,2646.96) 5894.65,2680 ccw(c5894.65,2713.04) R15.1@5918.01,2689.68
  Top Layer w30: 3008.06,4320.06 cw(c3090,4238.12) D3.1@3090,4354 ; 3059.27,4371.27 cw(c3090,4340.54) D3.1@3090,4384 ; D2.1@3083.86,4526.54 cw(c3064.2,4506.89) 3092,4506.89 ; D2.1@3083.86,4541.46 ccw(c3064.2,4561.11) 3092,4561.11 ; D1.1@3092,4727 3092,4404 2982,4294 2982,4162 ; C15.2@3459.4,3695 3459.4,3505.4 3396.5,3442.5 3393.5,3442.5 ; 3529.87,1986.13 ccw(c3569.84,2026.11) U3.2@3569.84,1969.58 ; U3.2@3590.31,1969.51 ccw(c3600.19,2027.81) 3642,1986 ; R12.2@3600,3088 3600,3236 3393.5,3442.5 ; C12.1@3688.67,1986 ccw(c3688.67,2026.65) C12.1@3725.65,2009.77 ; C12.1@3698.35,2022.23 cw(c3642,2047.94) 3642,1986 ; C12.1@3735.33,1986 ccw(c3735.33,2005.35) C12.1@3752.94,1997.32 ; C12.1@3741.39,2005.39 ccw(c3788.21,2052.21) 3788.21,1986 ; C12.1@3762.61,2026.61 ccw(c3860.64,2124.64) 3860.64,1986 ; C22.1@3887,1989 3887,2375 ; 3887,2062.73 ccw(c3985.42,2062.73) C22.1@3915.83,1993.14 ; v2@3887,2747 R13.1@3887,2686 R9.2@3887,2553 3887,2375 ; C23.1@4038,1986 3642,1986 ; 4302.37,2564.37 ccw(c4270.74,2596) P7.1@4315.47,2596 ; 4309,2574 4309,2571 4113,2375 3887,2375 ; C18.2@4668.45,2354.45 4732,2290.89 4732,2125 4987.5,1869.5 ; R20.2@4751,1665 R19.2@4986,1665 ; 4844.89,1665 cw(c4844.89,1637.2) R21.2@4864.54,1656.86 ; R21.2@4879.46,1656.86 cw(c4899.11,1637.2) 4899.11,1665 ; v3(4930,1785) 4930,1812 4987.5,1869.5 ; 4959.47,1665 cw(c4959.47,1633.79) R19.2@4981.54,1655.86 ; 5165.3,1605.7 ccw(c5225.69,1666.08) C21.1@5225.69,1580.69 ; P8.2@5187.73,1305.27 ccw(c5162.93,1330.07) 5198,1330.07 ccw(c5233.07,1330.07) P8.2@5208.27,1305.27 ; P8.1@5187.73,1384.73 cw(c5162.93,1359.93) 5198,1359.93 cw(c5233.07,1359.93) 5208.27,1384.73 cw(c5233.07,1359.93) 5233.07,1395 cw(c5233.07,1430.07) 5208.27,1405.27 cw(c5233.07,1430.07) 5198,1430.07 cw(c5162.93,1430.07) P8.1@5187.73,1405.27 ; P8.2@5198,1295 P8.1@5198,1395 ; 5198,1484.2 cw(c5313.49,1484.2) C21.1@5231.83,1565.86 ; 5198,1556.62 cw(c5241.06,1556.62) C21.1@5210.61,1587.07 ; 5399.81,1395 cw(c5399.81,1357.15) C7.2@5426.57,1383.91 ; C7.2@5434.4,1395 P8.1@5198,1395 ; C7.2@5438,1391.4 5741.4,1391.4 5959,1609 v5(5959,2412) ; R15.1@5924.17,2673.86 cw(c5895.62,2645.31) 5936,2645.31 ; v2(5936,2616) R15.1@5936,2673 ; 2982,4162 2982,3538 3026,3494 3342,3494 3393.5,3442.5 ; 2982,4162 2855,4162 2737.47,4044.47 2737.47,2698.98 3147,2289.46 R6.2@3147,2056 3183,2092 3424,2092 3551.11,1964.89 U3.2@3579.68,1964.89 3620.89,1964.89 3642,1986 ; 4987.5,1869.5 5111,1746 R18.2@5111,1660 5198,1573 P8.1@5198,1395 ; D3.1@3083.86,4371.46 ccw(c3064.2,4391.11) 3092,4391.11 cw(c3064.2,4391.11) D3.1@3083.86,4371.46
  Top Layer w40: D1.1@3092,4727 3169,4804 4499,4804 6171,4804 6492,4483 6492,2569 6335,2412 v5(5959,2412) ; 5116.22,4797.78 cw(c5131.24,4782.76) 5131.24,4804 ; 5116.76,4804 cw(c5116.76,4782.76) 5131.78,4797.78 ; 6487.78,3694.22 ccw(c6477.59,3704.41) 6492,3704.41 ; 6487.78,3709.78 cw(c6477.59,3699.59) 6492,3699.59
  Bottom Layer w10: v1@3466,3551 3632,3551 v1(3633,3550) ; v1@3468.12,3545.88 cw(c3480.49,3533.51) 3480.49,3551 ; 3623.34,3551 cw(c3623.34,3540.34) v1@3630.88,3547.88 ; R8.1@3922.93,3303.24 cw(c3922.93,3240.9) 3967.02,3284.98 ; R8.1@3922.93,3313.24 cw(c3922.93,3275.04) 3949.95,3302.05 ; R8.1@3931,3321 v1(3995,3257) ; R8.1@3941.61,3321.93 ccw(c3969.49,3321.93) 3949.78,3302.22 ; v2@4174,3617 ccw(c4164.34,3617) 4171.17,3623.83 ccw(c4178,3630.66) v2@4178,3621 ; v2(4178,3617) 4157,3638 4157,3869 4267.5,3979.5 ; 4209.05,3921.05 cw(c4221,3909.1) v2@4221,3926 ; v2(4221,3930) 4221,3932 4268,3979 4348,3979 v2(4370,4001) ; 4229.24,3940.24 ccw(c4239.49,3930) 4225,3930 cw(c4241.9,3930) 4229.95,3941.95 ; v2@4366,4001 cw(c4356.34,4001) 4363.17,3994.17 cw(c4370,3987.34) v2@4370,3997 ; C19.2@4635.88,2891.22 ccw(c4627.05,2924) v1(4661,2924) ; C19.2@4638.45,2868.55 4661,2891.11 v1(4661,2924) ; C19.2@4638.48,2881.56 ccw(c4630.57,2910.95) 4661,2910.95 ; C19.2@4641.08,2871.91 ccw(c4634.08,2897.9) 4661,2897.9 ; 4897.34,2970 cw(c4897.34,2959.34) v1@4904.88,2966.88 ; C17.2@4956.45,2938.45 4925.89,2969 v1(4907,2969) 4906,2970 4707,2970 v1(4661,2924)
  Bottom Layer w14: v3(5564,4547) v3@5564,4736
  Bottom Layer w20: C16.2@4393,4279.4 4496.6,4279.4 ; v2@4403,3817 v2(4626,3817) ; C16.2@4407.96,4268.38 cw(c4434.58,4241.76) 4434.58,4279.4 cw(c4434.58,4317.04) C16.2@4407.96,4290.43 ; v2(4499,4466) 4499,4185 v2@4553,4131 ; v2@5124,4610 v2(5124,4790)
  Bottom Layer w30: v2(3887,2749) 3941,2749 v2(3972,2780) ; R11.2@3889,2551 v3(3889,2619) ; C19.2@4638.45,2868.55 C19.2@4647.55,2868.55 ; v3(4932,1662) v3@4932,1782 ; R16.2@5860,2415 5936,2491 v2@5936,2614 ; v2(6266,3702) v2@6268.4,3702 ; C20.2@6268.4,3613 v2@6268.4,3702 ; v2@6268.4,3704.4 v2@6268.4,3702 ; 6491,3702 v2@6268.4,3702
  Bottom Layer w40: R16.2@5860,2415 5962,2415 v5@5964,2417
  other v1: 3466,3548
  other v2: 6480,3702 4402,3816 4555,4131
pads on no net: NU1.6 NU1.106 P20.5 P20.6 REST1.3 REST1.4 U1.7 U1.8 U1.9 U1.10 U4.1 U4.27 U4.28 U4.30 U4.55 U4.56 U5.1 U5.2 U5.3 U5.4 U5.5 U5.6 U5.10 U5.11 U5.14 U5.15 U5.20 U5.21 U5.22 U5.23 U5.24 U5.25 U5.26 U5.27 U5.28 U5.33 U5.34 U5.35 U5.38 U5.39 U5.40 U5.45 U5.46 U5.47 U5.48

## Polygon pours and split planes (outlines as drawn)
GND on Top Layer "TopLayer-No Net" (solid, remove dead copper): 2714,1359 2731,1342 2952,1342 2952,1198 2979,1171 3010,1202 6479,1202 6479,1400 6506,1427 6510,1431 6663,1431 6663,4670 6627,4706 6438,4706 6438,4836 6443,4841 6430,4828 2957,4828 2957,4725 2889,4657 2867,4635 2728,4635 2728,1347 2714,1333
GND on Bottom Layer "TopLayer-No Net" (solid, remove dead copper): 2737,1422 2894,1422 2898,1418 2903,1413 2903,1211 6478,1211 6483,1216 6483,1440 6632,1440 6636,1436 6631,1441 6631,4698 6470,4698 6438,4730 6438,4864 2966,4864 2889,4787 2916,4760 2916,4617 2737,4617 2723,4603 2723,1436

## Keep-outs
Keep-Out Layer:
  lines w10: 2692,4874 6653,4874 6656,4871 ; 2694,4876 2694,1150 6603,1150 6656,1203 6656,1393 ; 6658,1389 6658,4879

## Text inside footprints (layer, text, board x,y; h text height)
P8: Top Overlay "2" at 5298,1315 h35 r180; Top Overlay "1" at 5298,1415 h35 r180; Top Overlay "19" at 4238,1415 h35 r180; Top Overlay "20" at 4238,1315 h35 r180